# Altium PCB DC-DC SY8029AIC - PCB.PcbDoc
Units mil, origin at the board's own origin, x right, y up, seen from the top; angles counter-clockwise.
Board outline 640.75 x 325.56 mil, 2 copper layers (Top Layer, Bottom Layer); 12 components, 8 nets, 30 pads, 0 vias.
Unrouted connection lines stored in the file: 22.
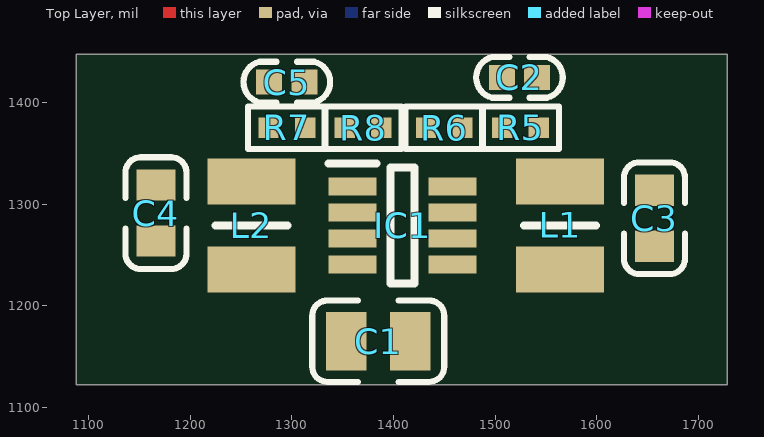
[diagram p0: Top Layer view]
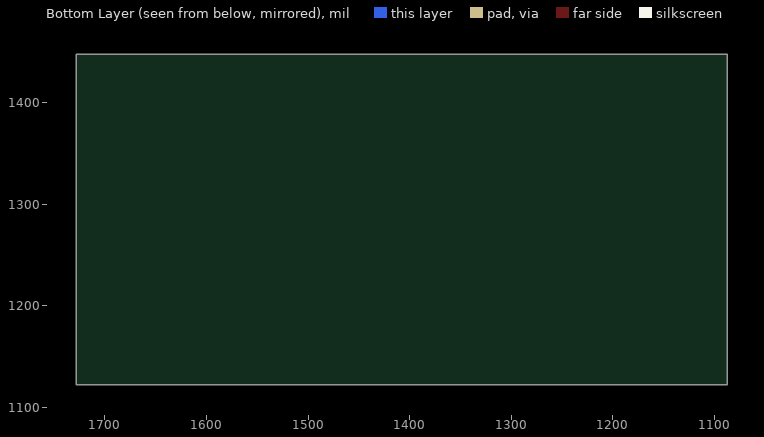
[diagram p1: Bottom Layer view, seen from below]

## Layer stack, top to bottom
Top Solder: solder mask 0.4, Solder Resist, Dk 3.5
Top Layer: signal copper 1.4
Dielectric 1: dielectric 12.6, FR-4, Dk 4.8
Bottom Layer: signal copper 1.4
Bottom Solder: solder mask 0.4, Solder Resist, Dk 3.5

## Board outline
1087.6,1122 1728.35,1122 1728.35,1447.56 1087.6,1447.56

## Design rules (kind name [scope] priority, off if disabled: settings)
Clearance [All] p1: gap=10 ignorepadtopadclearanceinfootprint=FALSE except(0: Arc-Hole Track-Hole SMDPad-Hole THPad-Hole Via-Hole Fill-Hole Poly-Hole Region-Hole Text-Hole)
PolygonConnect [All] p1: connectstyle=Relief reliefconductorwidth=10 reliefentries=4 polygonreliefangle="90 Angle" airgapwidth=10
RoomDefinition "DC-DC SY8029AIC" [InComponentClass('DC-DC SY8029AIC')] p1: confinementstyle=ConfineIn formatcopy=TRUE lockcomponents=FALSE outline 0,0 2000,0 2000,1000 0,1000
RoutingVias [All] p1: holewidth=28 width=50 viastyle="Through Hole" minholewidth=28 minwidth=50 maxholewidth=28 maxwidth=50
SolderMaskExpansion [All] p1: expansion=4 istentingtop=FALSE
Width [All] p1: maxlimit=10 minlimit=10 preferedwidth=10
30 further rules are at their usual default settings.

## Components (designator, comment, footprint, x,y, rotation, side; value= is the part's Value field where it differs from the comment)
C1 "10uF 10V" 0805C 1385,1165 r180 top
C2 "22pF 50V" 0402C 1524.01,1424.56 r0 top
C3 "22uF 6.3V" 0603C 1656.87,1286.05 r90 top
C4 "22uF 6.3V" 0603C 1166.24,1291.01 r90 top
C5 "22pF 50V" 0402C 1295,1420 r180 top
IC1 "SY8029AIC" SOT65P280X110-8N 1408.93,1278.89 r0 top
L1 "MLP2520K1R0MT0S1" INDC2520X100N 1564.01,1278.89 r90 top
L2 "MLP2520K1R0MT0S1" INDC2520X100N 1260.04,1278.89 r270 top
R5 "100k" 0402R 1525,1375 r0 top
R6 "49.9k" 0402R 1450,1375 r0 top
R7 "100k" 0402R 1295,1375 r180 top
R8 "22.2k" 0402R 1370,1375 r180 top

## Footprints (in the part's own frame and the unit in brackets; to place one, negate y for a bottom-side part, rotate by r counter-clockwise, add the part's x,y. Pads: shape width x height; smd on the part's side, far side on the other; paste and mask are expansions set on the pad)
0402C [mm]
  rect 0.65x0.62 smd: 1(-0.44,0) 2(0.44,0)
  silkscreen extent -1.08,-0.51 1.08,0.51, body extent -0.53,-0.27 0.52,0.27, height 0.55
0402R [mil]
  rect 20x20 smd: 1(-18,0) 2(18,0)
  silkscreen extent -38,-21 38,21, body extent -20,-11 20,11, height 16
0603C [mm]
  rect 0.78x0.98 smd: 1(-0.7,0) 2(0.7,0)
  silkscreen extent -1.4,-0.76 1.4,0.76, body extent -0.8,-0.4 0.8,0.4, height 0.87
0805C [mm]
  rect 1.02x1.47 smd: 1(-0.8,0) 2(0.8,0)
  silkscreen extent -1.65,-1.02 1.65,1.02, body extent -1,-0.62 1,0.63, height 0.88
INDC2520X100N [mm]
  rect 1.15x2.2 smd: 1(-1.1,0) 2(1.1,0)
  silkscreen extent 0,-0.9 0,0.9, body extent -1.25,-1 1.25,1, height 1
SOT65P280X110-8N [mm]
  rect 1.2x0.45 smd: 1(-1.25,0.975) 2(-1.25,0.325) 3(-1.25,-0.325) 4(-1.25,-0.975) 5(1.25,-0.975) 6(1.25,-0.325) 7(1.25,0.325) 8(1.25,0.975)
  silkscreen extent -1.85,-1.45 0.3,1.55, body extent -1.4,-1.45 1.4,1.45, height 1.1

## Part data
C1 C2 C3 C4 C5: library part CAP-NP
IC1: "Integrated Circuit", Manufacturer_Name="Silergy Corp", Datasheet Link=https://datasheet.lcsc.com/szlcsc/Silergy-Corp-SY8029AIC_C207636.pdf, Height=1.1mm, Manufacturer_Part_Number=SY8029AIC
L1: "Inductor", Manufacturer_Name=TDK, Mouser Part Number=810-MLP2520K1R0MT0S1, Supplier Part Number 1=445-15738-1-ND, Arrow Part Number=MLP2520K1R0MT0S1, Arrow Price/Stock=https://www.arrow.com/en/products/mlp2520k1r0mt0s1/tdk, Datasheet Link=https://www.arrow.com/en/products/mlp2520k1r0mt0s1/tdk, Height=1mm, Manufacturer_Part_Number=MLP2520K1R0MT0S1, Mouser Price/Stock=https://www.mouser.com/Search/Refine.aspx?Keyword=810-MLP2520K1R0MT0S1, Supplier 1=Digi-Key
L2: "Inductor", Manufacturer_Name=TDK, Mouser Part Number=810-MLP2520K1R0MT0S1, Arrow Part Number=MLP2520K1R0MT0S1, Arrow Price/Stock=https://www.arrow.com/en/products/mlp2520k1r0mt0s1/tdk, Datasheet Link=https://www.arrow.com/en/products/mlp2520k1r0mt0s1/tdk, Height=1mm, Manufacturer_Part_Number=MLP2520K1R0MT0S1, Mouser Price/Stock=https://www.mouser.com/Search/Refine.aspx?Keyword=810-MLP2520K1R0MT0S1
R5 R6 R7 R8: library part RES

## Nets (pads, with @x,y where several pads share a name; then routed paths per layer and width w, separated by ;. In a path a pad name is that pad's centre, name@x,y a point inside that pad or via, vN(x,y) a via of type N, cw(c..) or ccw(c..) an arc to the next point about the centre after c; other vN are vias at no path point)
1V8: C2.2 C3.2 L1.2 R5.2
3V3: C4.2 C5.2 L2.1 R7.2
5V: C1.1 IC1.2 IC1.6 IC1.7
GND: C1.2 C3.1 C4.1 IC1.4 R6.1 R8.1
NetC2_1: C2.1 IC1.8 R5.1 R6.2
NetC5_1: C5.1 IC1.1 R7.1 R8.2
NetIC1_3: IC1.3 L2.2
NetIC1_5: IC1.5 L1.1